# EAGLE board uc4h esc kiss v100 (EAGLE 7.5.0)
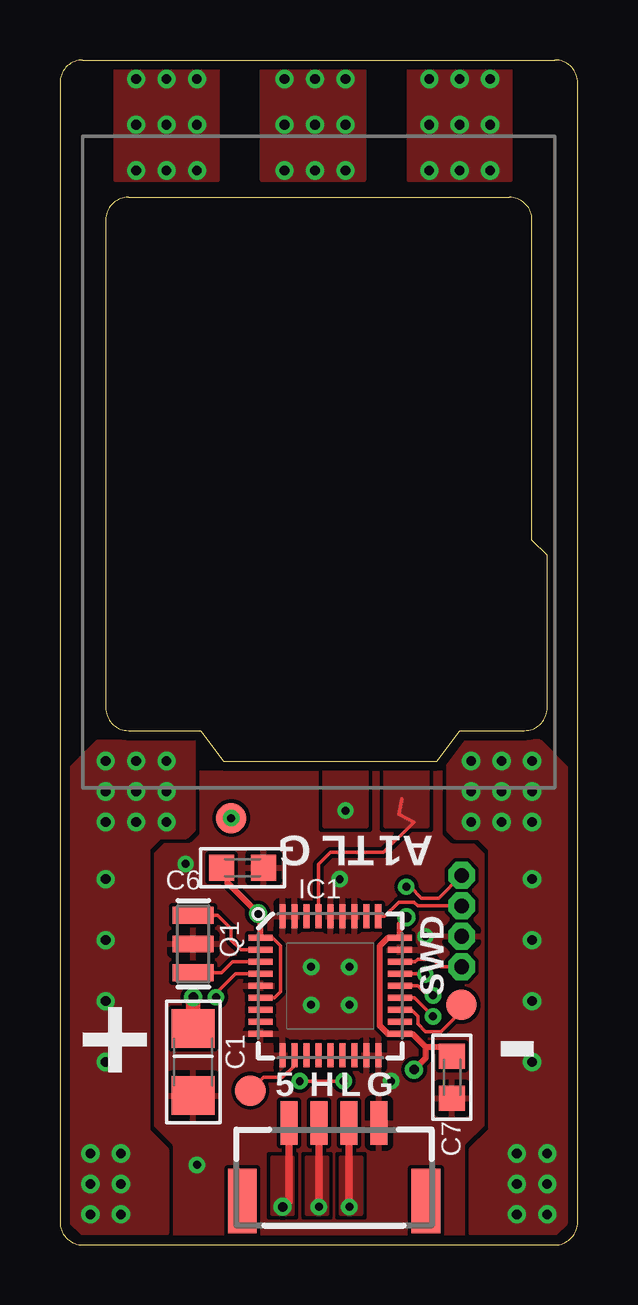
[diagram p0: board, top side]
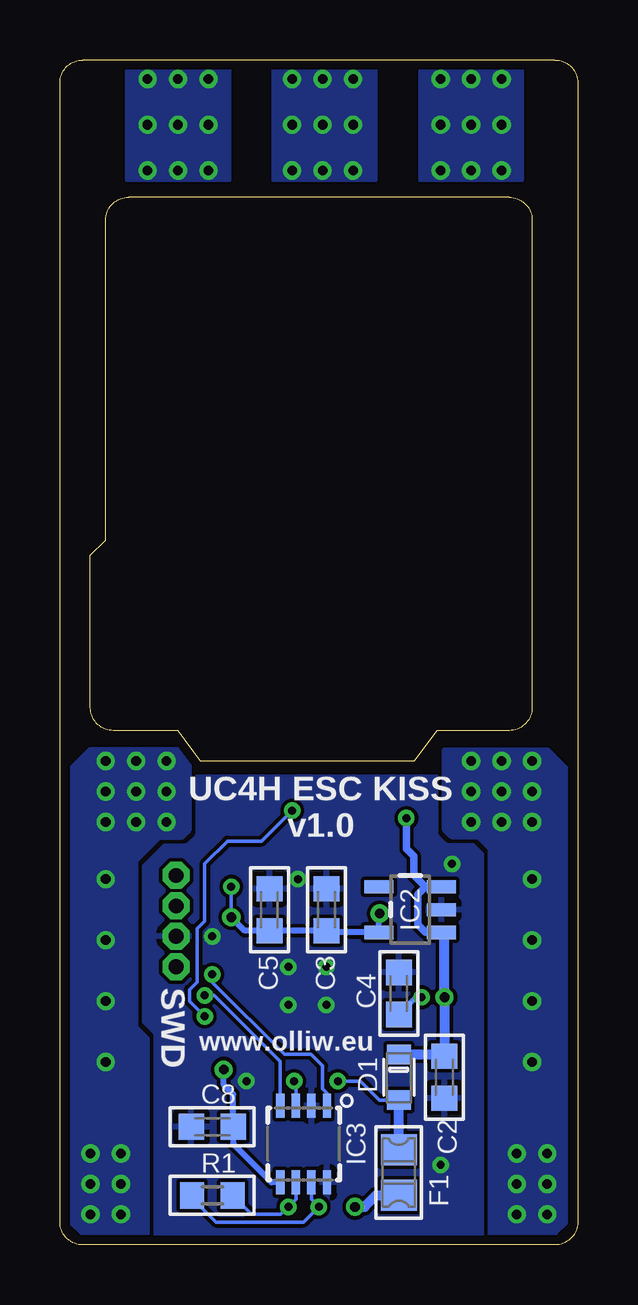
[diagram p1: board, bottom side, seen from below]

Size 21.59 x 49.37 mm. Coordinates in mm from the lower left corner, seen from the top.
Outline: 0.95,0 20.64,0 arc90 21.59,0.95 21.59,48.42 arc90 20.64,49.37 0.95,49.37 arc90 0,48.42 0,0.95 arc90 0.95,0
Outline: 2.86,43.66 18.73,43.66 arc-90 19.68,42.7 19.68,29.37 20.32,28.73 20.32,22.38 arc-90 19.37,21.43 16.67,21.43 15.72,20.16 6.83,20.16 5.87,21.43 2.86,21.43 arc-90 1.91,22.38 1.91,42.7 arc-90 2.86,43.66
Copper layers (1*16): Top 0.0356mm / dielectric 1.5011mm / Bottom 0.0356mm
Design rules "ow-oshpark-2layer": minimum track width 6mil, minimum drill 13mil, track to track 6mil, track to pad 6mil, pad to pad 6mil, via to via 6mil, smd to smd 6mil, copper to edge 15mil, drill to drill 6mil, minimum pad ring 7mil, minimum via ring 7mil, stop-mask expansion 2.5mil, vias tented up to drill 26mil, thermal gap 10mil

## Footprints (pad centres in the part's own frame; a part is rotated, then mirrored left to right if it is on the bottom)
C1206 = smd 1.6 x 1.8: 1 -1.4,0; 2 1.4,0
C0603K = smd 1.05 x 1.08: 1 -0.875,0; 2 0.875,0
SOD110-R = smd 0.8 x 1: A 0.95,0; C -0.95,0
FUSE-0805 = smd 1.3 x 1.5: 1 -0.95,0; 2 0.95,0
VFQFPN36 = smd 1 x 0.25: 1 -2.9,2; 2 -2.9,1.5; 3 -2.9,1; 4 -2.9,0.5; 5 -2.9,0; 6 -2.9,-0.5; 7 -2.9,-1; 8 -2.9,-1.5; 9 -2.9,-2; 19 2.9,-2; 20 2.9,-1.5; 21 2.9,-1; 22 2.9,-0.5; 23 2.9,0; 24 2.9,0.5; 25 2.9,1; 26 2.9,1.5; 27 2.9,2 | smd 0.25 x 1: 10 -2,-2.9; 11 -1.5,-2.9; 12 -1,-2.9; 13 -0.5,-2.9; 14 0,-2.9; 15 0.5,-2.9; 16 1,-2.9; 17 1.5,-2.9; 18 2,-2.9; 29 1.5,2.9; 30 1,2.9; 31 0.5,2.9; 32 0,2.9; 33 -0.5,2.9; 34 -1,2.9; 35 -1.5,2.9; 36 -2,2.9 | smd 0.27 x 1: 28 2,2.9
SOT23-5 = smd 0.55 x 1.2: 1 -0.95,-1.3; 2 0,-1.3; 3 0.95,-1.3; 4 0.95,1.3; 5 -0.95,1.3
HVSON8 = smd 1 x 0.35: 1 -1.6,0.975; 2 -1.6,0.325; 3 -1.6,-0.325; 4 -1.6,-0.975; 5 1.6,-0.975; 6 1.6,-0.325; 7 1.6,0.325; 8 1.6,0.975
SM04B-GHS-TB = smd 0.7 x 1.8: 1 -1.875,4.6; 2 -0.625,4.6; 3 0.625,4.6; 4 1.875,4.6 | smd 1.2 x 2.7: FIT@1 -3.825,1.35; FIT@2 3.825,1.35
RESONATOR-SMD = smd 0.7 x 1.7: 1 -1.2,0; 2 0,0; 3 1.2,0
R0603 = smd 1 x 1.1: 1 -0.85,0; 2 0.85,0
4X1_1P27_OCT_BILEX = drill 0.61 pad 1.118 octagon: 1 0,0; 2 0,-1.27; 3 0,-2.54; 4 0,-3.81
B1,27 = smd 1.27 x 1.27: TP 0,0

## Placement (x,y rotation side)
C1  10u/10V  [C1206]  5.56,7.62 270 top
C2  100n  [C0603K]  5.56,6.99 270 bottom
C3  1u  [C0603K]  10.48,13.97 90 bottom
C4  100n  [C0603K]  7.46,10.48 90 bottom
C5  100n  [C0603K]  12.86,13.97 90 bottom
C6  100n  [C0603K]  7.62,15.72 0 top
C7  100n  [C0603K]  16.35,6.99 270 top
C8  100n  [C0603K]  15.24,4.92 180 bottom
D1  BAT54J  [SOD110-R]  7.46,6.99 270 bottom
F1  0ZCK0020FF2G  [FUSE-0805]  7.46,3.02 270 bottom
IC1  STM32F103T8  [VFQFPN36]  11.27,10.79 0 top
IC2  TC1015-3.3VCT713  [SOT23-5]  6.98,13.97 90 bottom
IC3  TJA1051TK/3  [HVSON8]  11.43,4.21 270 bottom
JP1  JST-GH-4  [SM04B-GHS-TB]  11.43,0.48 0 top
Q1  CSTCE8M00G55-R0  [RESONATOR-SMD]  5.56,12.54 270 top
R1  120  [R0603]  15.24,2.06 0 bottom
SWD  PH4  [4X1_1P27_OCT_BILEX]  16.75,15.4 0 top
TP1  TPB1,27  [B1,27]  7.94,6.43 0 top
TP2  TPB1,27  [B1,27]  16.75,10 0 top
TP3  TPB1,27  [B1,27]  7.14,17.78 0 top

## Library data of the parts
C1-C8 R1 = rcl
D1 = diode
F1 IC3 JP1 SWD = # stdlib
IC1 = # stm32
IC2 Q1 = # SparkFun2
TP1-TP3 = testpad

## Nets
3.3V: C3.1 C5.1 C6.1 C7.1 C8.1 IC1.1 IC1.6 IC1.19 IC1.27 IC2.5 IC3.5 SWD.1
5V: C1.1 C2.1 D1.C IC2.1 IC2.3 TP3.TP
A1: IC1.33
A2: IC1.34
B1: IC1.15
B2: IC1.16
C1: IC1.7
C2: IC1.8
CAN-5V: F1.2 JP1.1
CANH: IC3.7 JP1.2 R1.1
CANL: IC3.6 JP1.3 R1.2
CANRX: IC1.23 IC3.4
CANTX: IC1.24 IC3.1
GND: C1.2 C2.2 C3.2 C4.2 C5.2 C6.2 C7.2 C8.2 IC1.5 IC1.9 IC1.10 IC1.17 IC1.18 IC1.26 IC1.30 IC1.31 IC1.32 IC1.35 IC1.36 IC2.2 IC3.2 IC3.8 JP1.4 Q1.2 SWD.3
LED: IC1.11 TP1.TP
N$1: C4.1 IC1.4
N$2: D1.A F1.1 IC3.3
N$5: IC1.2 Q1.1
N$6: IC1.3 Q1.3
SWCLK: IC1.28 SWD.2
SWDIO: IC1.25 SWD.4
TLM: IC1.22
TX1: IC1.21 TP2.TP

## Tracks (layer width: path | path; a pad name or v marks a point on that pad's centre or on a via)
3.3V  (via drill 0.33, 0.4)
  Top 0.152: 15.96,8.1 C7.1 16.27,8.26 | IC1.6 8.95,10.29 9.21,10.56 9.21,12.46 8.87,12.79 IC1.1 | SWD.1 15.8,14.45 15.08,14.45 14.61,14.92 v14.45,14.92
  Top 0.254: 15.24,8.26 16.27,8.26 | C6.1 6.83,15.72 6.98,15.56 6.98,15.08 v8.26,13.81 8.37,13.7 IC1.1 | v14.45,13.65 14.17,13.38 IC1.27 13.67,12.79 13.34,12.46 13.34,9.13 13.67,8.79 IC1.19 14.7,8.79 15.24,8.26 | 15.24,8.26 15.24,7.78 v14.76,7.3
  Bottom 0.152: v14.45,14.92 v14.45,13.65 | C3.1 10.24,13.1 10.16,13.02 10.26,13.02 10.03,13.02
  Bottom 0.254: v14.76,7.3 14.76,6.67 14.36,6.27 C8.1 14.36,4.21 12.77,2.61 IC3.5 | v14.45,13.65 13.89,13.1 C5.1 C3.1 | 10.03,13.02 IC2.5 8.29,13.78 v8.26,13.81
5V  (via drill 0.33, 0.4)
  Top 0.61: C1.1 v5.56,10.32
  Bottom 0.152: 5.63,7.93 C2.1 | IC2.1 5.56,12.89
  Bottom 0.203: 6.35,14.92 6.35,14.93
  Bottom 0.305: IC2.3 6.35,14.92 6.67,14.61 6.67,13.34 6.35,13.02 IC2.1 | 6.35,14.93 6.83,15.4 6.83,16.19 7.14,16.51 TP3.TP
  Bottom 0.406: D1.C 5.63,7.93 | C2.1 v5.56,10.32 5.56,12.89
  other vias: 7.14,17.78
A1
  Top 0.152: 14.26,18.6 14.13,17.94 14.76,17.62 13.49,16.35 11.27,16.35 10.77,15.85 IC1.33
  pour Top (isolate 0.305, no thermals): 13.57,20 13.57,17.46 15.32,17.46 15.32,20
BATM  (via drill 0.4)
  other vias: 19.68,15.24 19.68,17.62 18.41,17.62 17.14,17.62 17.14,18.89 18.41,18.89 19.68,18.89 19.68,12.7 19.68,10.16 19.68,7.62 20.32,2.54 20.32,3.81 19.05,3.81 19.05,2.54 19.05,1.27 20.32,1.27 17.14,20.16 18.41,20.16 19.68,20.16
  pour Bottom (isolate 0.406): 20.32,20.64 21.11,19.84 21.11,0.95 20.64,0.48 17.94,0.48 17.94,8.57 18.41,9.05 18.41,16.03 17.46,16.99 16.51,16.99 16.19,17.3 16.19,20.64
  pour Top (isolate 0.406): 17.14,0.48 20.64,0.48 21.11,0.95 21.11,19.84 20,20.95 16.19,20.95 16.19,17.3 16.51,16.99 17.46,16.99 17.94,16.51 17.94,4.76 17.14,3.97
BATP  (via drill 0.4)
  other vias: 1.91,15.24 1.91,12.7 1.91,10.16 1.91,7.62 1.27,2.54 1.91,17.62 1.91,18.89 3.18,18.89 4.45,18.89 3.18,17.62 4.45,17.62 1.27,3.81 2.54,3.81 2.54,2.54 2.54,1.27 1.27,1.27 1.91,20.16 3.18,20.16 4.45,20.16
  pour Bottom (isolate 0.406): 5.56,20.64 1.27,20.64 0.48,19.84 0.48,0.95 0.95,0.48 3.65,0.48 3.65,16.51 4.13,16.99 5.24,16.99 5.56,17.3
  pour Top (isolate 0.406): 4.45,0.48 0.95,0.48 0.48,0.95 0.48,19.84 1.59,20.95 5.56,20.95 5.56,17.3 5.24,16.99 4.13,16.99 3.65,16.51 3.65,4.76 4.45,3.97
CAN-5V  (via drill 0.4)
  Top 0.305: JP1.1 9.55,1.78 v9.29,1.59
  Bottom 0.152: F1.2
  Bottom 0.406: v9.29,1.59 8.89,1.59 8.41,2.06 F1.2
  pour Top: 9.72,3.65 8.85,3.65 8.85,1.27 9.72,1.27
CANH  (via drill 0.33)
  Top 0.152: 10.8,1.74 v10.8,1.59
  Top 0.305: JP1.2 10.8,1.74
  Bottom 0.152: IC3.7 11.11,1.9 v10.8,1.59 11.43,0.95 15.08,0.95 16.03,1.91 R1.1
  pour Top: 10.28,3.65 11.15,3.65 11.15,1.27 10.28,1.27
CANL  (via drill 0.33)
  Top 0.152: 12.05,1.58 v12.07,1.59
  Top 0.305: JP1.3 12.05,1.58
  Bottom 0.152: IC3.6 11.75,1.9 v12.07,1.59 12.38,1.27 13.6,1.27 R1.2
  pour Top: 11.71,3.65 12.58,3.65 12.58,1.27 11.71,1.27
CANRX  (via drill 0.33)
  Top 0.152: IC1.23 14.92,10.79 15.32,10.4 v15.56,10.4
  Bottom 0.152: v15.56,10.4 15.16,10.4 12.41,7.64 IC3.4
CANTX  (via drill 0.33)
  Top 0.152: IC1.24 15.22,11.29 v15.24,11.27
  Bottom 0.152: v15.24,11.27 15.24,10.95 12.22,7.94 11.11,7.94 10.64,7.46 10.64,6.51 10.46,6.33 IC3.1
GND  (via drill 0.33)
  other vias: 10.48,11.59 10.48,10 12.07,10 12.07,11.59 15.24,12.86 5.24,15.88 11.67,15.24 13.81,6.83 5.71,3.33
  pour Bottom (isolate 0.152, rank 6): 3.49,19.53 18.1,19.53 18.1,0 3.49,0
  pour Top (isolate 0.152, rank 6): 3.49,19.68 18.1,19.68 18.1,0 3.49,0
LED
  Top 0.152: IC1.11 9.77,7.47 9.29,6.99 8.49,6.99 TP1.TP
N$1  (via drill 0.33)
  Top 0.152: IC1.4 7.33,11.29 6.51,10.48 v6.51,10.32
  Bottom 0.203: v6.51,10.32 6.75,10.32 C4.1
N$2  (via drill 0.33)
  Top 0.152: v11.83,6.83 v10,6.83
  Bottom 0.152: v10,6.83 9.05,6.83 8.26,6.04 D1.A | IC3.3 11.75,6.75 v11.83,6.83
  Bottom 0.406: F1.1 D1.A
N$5
  Top 0.152: IC1.2 7.55,12.29 7.14,12.7 7.14,13.18 6.58,13.74 Q1.1
N$6
  Top 0.152: IC1.3 7.19,11.79 6.74,11.34 Q1.3
PHASE1  (via drill 0.4)
  other vias: 4.45,48.58 3.18,48.58 5.71,48.58 5.71,46.67 4.45,46.67 3.18,46.67 3.18,44.77 4.45,44.77 5.71,44.77
  pour Top: 2.3,49.29 2.3,44.37 6.59,44.37 6.59,49.29
  pour Bottom: 2.3,49.29 2.3,44.37 6.59,44.37 6.59,49.29
PHASE2  (via drill 0.4)
  other vias: 10.64,48.58 9.37,48.58 9.37,46.67 9.37,44.77 10.64,44.77 10.64,46.67 11.91,46.67 11.91,48.58 11.91,44.77
  pour Top: 8.41,49.29 8.41,44.37 12.7,44.37 12.7,49.29
  pour Bottom: 8.41,49.29 12.7,49.29 12.7,44.37 8.41,44.37
PHASE3  (via drill 0.4)
  other vias: 17.94,48.58 16.67,48.58 15.4,48.58 15.4,46.67 16.67,46.67 17.94,46.67 17.94,44.77 16.67,44.77 15.4,44.77
  pour Top: 14.53,49.29 14.53,44.37 18.81,44.37 18.81,49.29
  pour Bottom: 14.53,49.29 18.81,49.29 18.81,44.37 14.53,44.37
SWCLK
  Top 0.152: IC1.28 13.54,13.7 14.13,14.29 14.76,14.29 14.92,14.13 SWD.2
SWDIO
  Top 0.152: IC1.25 14.81,11.79 14.92,11.91 15.56,11.91 15.88,11.59 SWD.4
TLM  (via drill 0.33)
  Top 0.152: IC1.22 14.79,10.29 v15.56,9.53
  Bottom 0.152: v15.56,9.53 16.19,10.16 16.19,10.64 15.88,10.95 15.88,13.18 15.56,13.49 15.56,15.88 14.61,16.83 13.18,16.83 v11.91,18.1
  pour Top (isolate 0.305, no thermals): 11.03,20 11.03,17.46 12.78,17.46 12.78,20
TX1
  Top 0.152: IC1.21 14.65,9.79 14.92,9.53 14.92,9.21 15.24,8.89 15.88,8.89 16.67,9.68 TP2.TP

## Text on the board
tNames: G | TL | A1 | SWD | + | - | 5 | H | L | G
bNames: UC4H ESC KISS / v1.0 | SWD | www.olliw.eu